# Altium PCB PCB1.PcbDoc
Units mm, origin at the board's own origin, x right, y up, seen from the top; angles counter-clockwise.
Board outline 127 x 80.77 mm, 2 copper layers (Top Layer, Bottom Layer); 21 components, 20 nets, 89 pads, 0 vias.
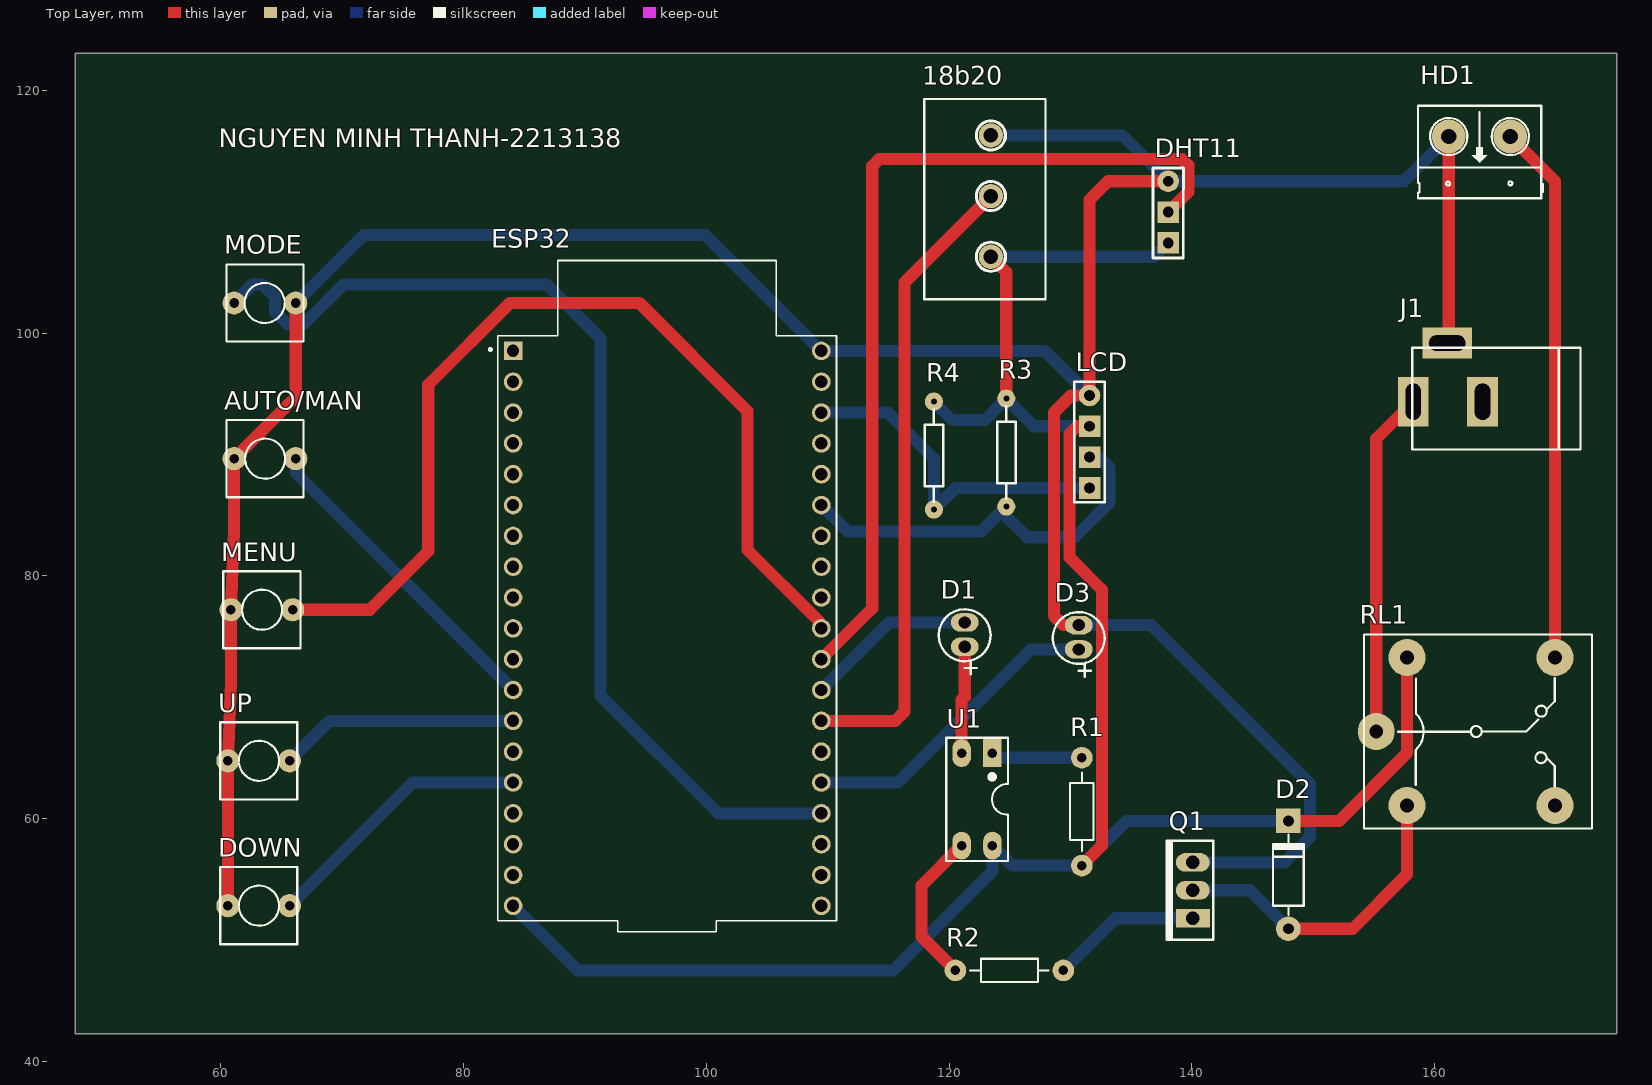
[diagram p0: Top Layer view]
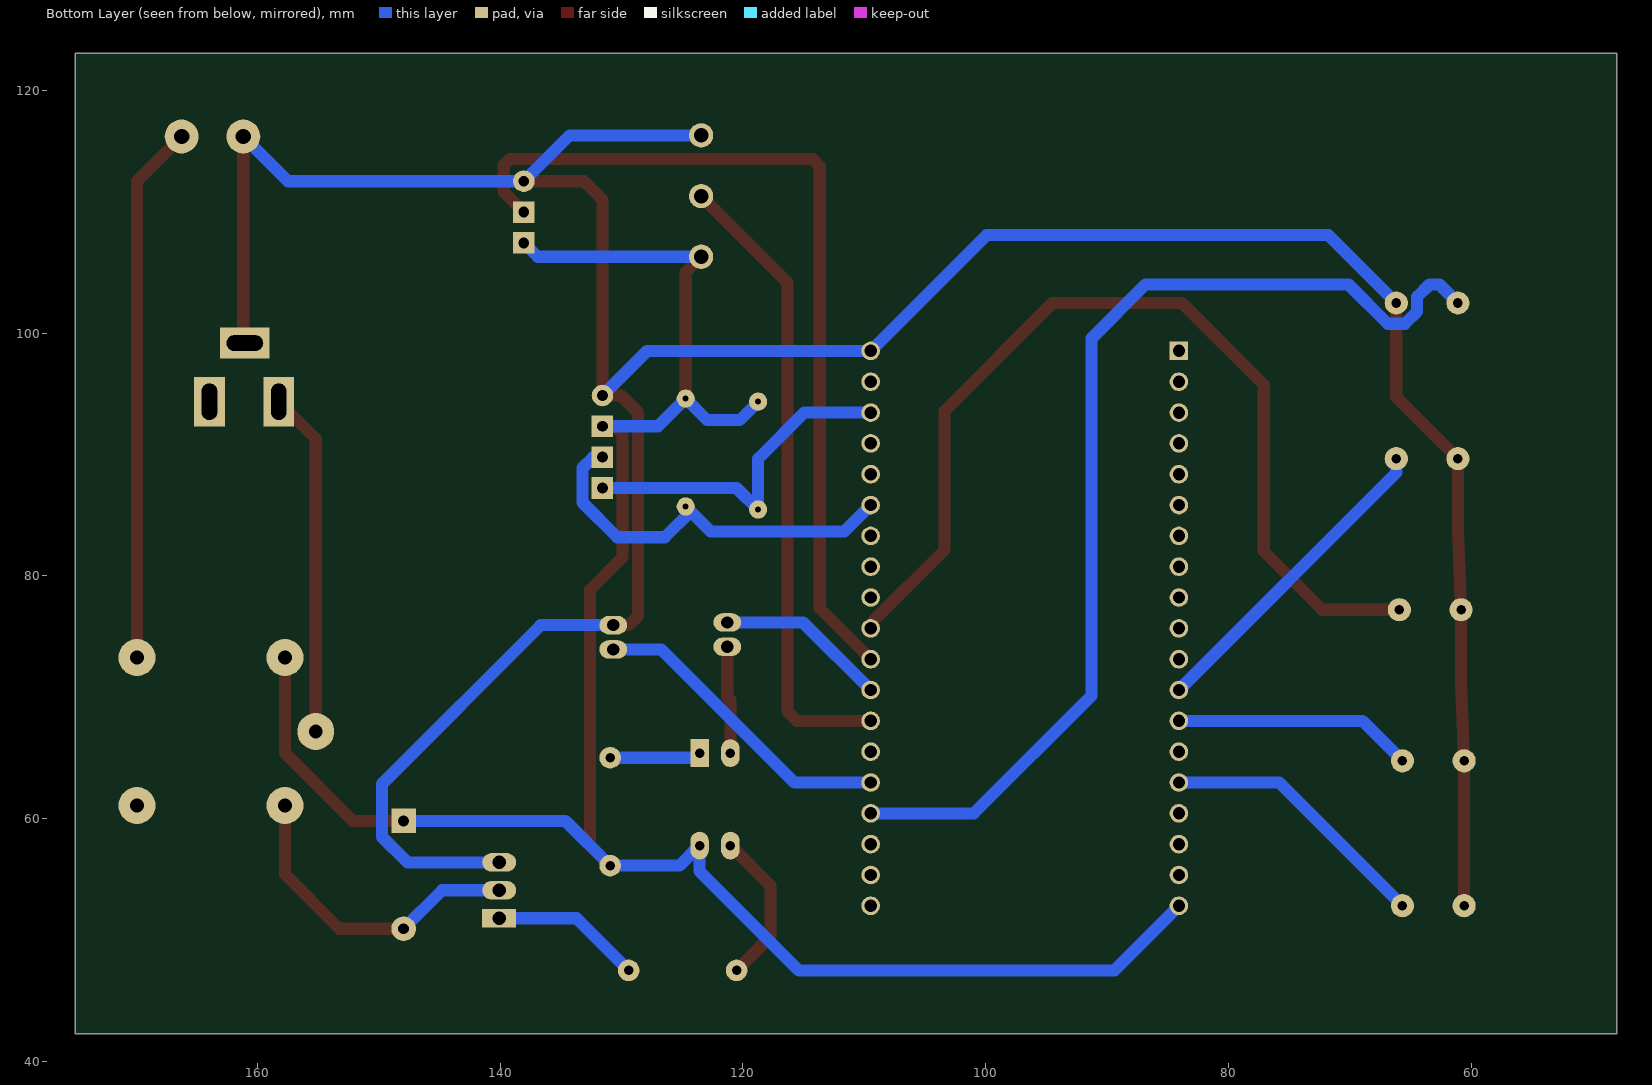
[diagram p1: Bottom Layer view, seen from below]

## Layer stack, top to bottom
Top Solder: solder mask 0.0102, Solder Resist, Dk 3.5
Top Layer: signal copper 0.0356
Dielectric 1: dielectric 0.32, FR-4, Dk 4.8
Bottom Layer: signal copper 0.0356
Bottom Solder: solder mask 0.0102, Solder Resist, Dk 3.5

## Board outline
48.006,42.291 175.006,42.291 175.006,123.063 48.006,123.063

## Design rules (kind name [scope] priority, off if disabled: settings)
Clearance [All] p1: gap=0.254 ignorepadtopadclearanceinfootprint=FALSE
PolygonConnect [All] p1: connectstyle=Relief reliefconductorwidth=0.254 reliefentries=4 polygonreliefangle="90 Angle" airgapwidth=0.254
RoutingVias [All] p1: holewidth=0.711 width=1.27 viastyle="Through Hole" minholewidth=0.711 minwidth=1.27 maxholewidth=0.711 maxwidth=1.27
SolderMaskExpansion [All] p1: expansion=0.102 istentingtop=FALSE
SupplyNets "Schematic Supply Nets_1" [InNet('GND')] p1: voltage=0.000
SupplyNets "Schematic Supply Nets" [InNet('VCC')] p2: voltage=0.000
Width [All] p1: maxlimit=1 minlimit=0.254 preferedwidth=1 toplayer_minwidth=1 minimp=50.000000 maximp=50.000000 favimp=50.000000
30 further rules are at their usual default settings.

## Components (designator, comment, footprint, x,y, rotation, side; value= is the part's Value field where it differs from the comment)
18b20 "18B20" HED3 123.444,111.299 r270 top
AUTO/MAN "SW" SW2 66.167,89.662 r180 top value="SW chip 2 pin"
D1 "LED" CAP10UF 121.285,76.168 r270 top
D2 "1N4007" D1A 147.955,50.927 r270 top
D3 "LED" CAP10UF 130.683,75.946 r270 top
DHT11 "Component_1" "Jumper 3" 138.049,112.522 r270 top
DOWN "SW" SW2 65.659,52.832 r180 top value="SW chip 2 pin"
ESP32 "ESP32-DEVKITC" MODULE_ESP32-DEVKITC 96.774,75.692 r0 top
HD1 "Header 2" HED2 166.243,116.205 r180 top
J1 "JACK DC 5MM" "JACK DC 5MM" 166.878,94.361 r180 top
LCD "Component_1" "Jumper 4" 131.572,93.574 r270 top
MENU "SW" SW2 65.913,77.216 r180 top value="SW chip 2 pin"
MODE "SW" SW2 61.087,102.489 r0 top value="SW chip 2 pin"
Q1 "C1815" TO126 140.081,54.102 r90 top
R1 "1k" R1/4W 130.937,56.134 r90 top value="R1/4W - 1K"
R2 "1k" R1/4W 120.523,47.498 r0 top value="R1/4W - 1K"
R3 "4.7k" R1/6W 124.714,90.17 r90 top value="R1/4W - 1K"
R4 "4.7k" R1/6W 118.745,89.916 r90 top value="R1/4W - 1K"
RL1 "Relay 10A/12V" RL_SPDT_10A 155.194,67.183 r0 top value="Relay SPDT, 10A, 12V"
U1 "PC817" DIP4/W0.3 123.571,65.405 r180 top
UP "SW" SW2 65.659,64.77 r180 top value="SW chip 2 pin"

## Footprints (in the part's own frame and the unit in brackets; to place one, negate y for a bottom-side part, rotate by r counter-clockwise, add the part's x,y. Pads: shape width x height; smd on the part's side, far side on the other; paste and mask are expansions set on the pad)
CAP10UF [mil]
  oval 60x90 hole 39.37 unplated: 1(78.74,0) 2(0,0)
  silkscreen extent -42,-84 167,84
D1A [mil] "Diode 1A, W 100mil, L 350mil"
  round 80 hole 35: 1(0,0)
  rect 80x80 hole 35: 2(-350,0)
  silkscreen extent -305,-50 -45,50, body extent -386,-33 34,36, height 84
DIP4/W0.3 [mil] "4 PIN, W 300mil, Pin to pin 100mil"
  rect 60x90 hole 31: 1(0,0)
  oval 60x90 hole 31: 2(100,0) 3(100,300) 4(0,300)
  silkscreen extent -50,-50 150,350, body extent -59,-10 159,305, height 170
HED2 [mil] "Header 2, 2 pin, hight 300mil, Pin to Pin 200, Colour Green"
  round 110 hole 50: 1(0,0) 2(200,0)
  silkscreen extent -106,-100 300,200, body extent -92,-140 302,155, height 394
HED3 [mm]
  round 2 hole 1.2 mask+0.01: 1(-5,0) 2(0,0) 3(5,0)
  silkscreen extent -8,-5.5 8.5,4.5, body extent -7.5,-5 8,4, height 12.5
"JACK DC 5MM" [mil]
  rect 100x160 hole 50 slot 118.11 at 90 deg: 1(340,0) 2(115,0)
  rect 160x100 hole 50 slot 118.11 at 0 deg: 3(230,-190)
  silkscreen extent -202,-175 343,155, body extent -187,-200 357,174, height 434
"Jumper 3" [mil]
  round 70 hole 35 unplated: 1(0,0)
  rect 70x70 hole 35 unplated: 2(100,0) 3(200,0)
  silkscreen extent -43,-49 249,49
"Jumper 4" [mil]
  round 70 hole 35 unplated: 1(-51,0)
  rect 70x70 hole 35 unplated: 2(49,0) 3(149,0) 4(249,0)
  silkscreen extent -95,-49 295,49
MODULE_ESP32-DEVKITC [mm]
  rect 1.53x1.53 / inner round 1.53 / far side rect 1.53x1.53 hole 1.02: 1(-12.7,22.85)
  round 1.53 hole 1.02: 2(-12.7,20.31) 3(-12.7,17.77) 4(-12.7,15.23) 5(-12.7,12.69) 6(-12.7,10.15) 7(-12.7,7.61) 8(-12.7,5.07) 9(-12.7,2.53) 10(-12.7,-0.01) 11(-12.7,-2.55) 12(-12.7,-5.09) 13(-12.7,-7.63) 14(-12.7,-10.17) 15(-12.7,-12.71) 16(-12.7,-15.25) 17(-12.7,-17.79) 18(-12.7,-20.33) 19(-12.7,-22.87) 20(12.7,-22.87) 21(12.7,-20.33) 22(12.7,-17.79) 23(12.7,-15.25) 24(12.7,-12.71) 25(12.7,-10.17) 26(12.7,-7.63) 27(12.7,-5.09) 28(12.7,-2.55) 29(12.7,-0.01) 30(12.7,2.53) 31(12.7,5.07) 32(12.7,7.61) 33(12.7,10.15) 34(12.7,12.69) 35(12.7,15.23) 36(12.7,17.77) 37(12.7,20.31) 38(12.7,22.85)
  silkscreen extent -14.67,-25 13.95,30.3, body extent -13.97,-24.8 13.97,30.3, height 6.69
R1/4W [mil] "R 1/4W, 2 Pin, 350mil"
  round 70 hole 31: 1(0,0) 2(350,0)
  silkscreen extent 48,-38 302,38, body extent -40,-47 386,47, height 111
R1/6W [mm]
  round 1.5 hole 0.5: 1(-4.445,0) 2(4.445,0)
  silkscreen extent -3.81,-0.76 3.81,0.76
RL_SPDT_10A [mil] "Relay SPDT, 5 pin, 10A,W 650mil, L 800mil, H 800mil"
  round 120 hole 45: 1(0,0) 2(580,240) 3(580,-240) 4(100,-240) 5(100,240)
  silkscreen extent -40,-315 700,315, body extent -33,-307 719,303, height 642
SW2 [mil] "SW button 2pin, 250x 250 mil"
  round 75 hole 31: 1(0,0) 2(200,0)
  silkscreen extent -25,-125 225,125
TO126 [mil] "TO, Thru-Hole, Vertical, Heatsink Mounted; 3 In-Line Leads; Pitch 2.54 mm; Pin sequence 1, 3, 2"
  rect 60x110 hole 43.31: 1(-90.55,0)
  oval 60x110 hole 43.31: 2(0,0) 3(90.55,0)
  silkscreen extent -160,-67 160,85, body extent -154,-71 154,35, height 614

## Part data
AUTO/MAN DOWN MENU MODE UP: library part SW2, "Switch button 2 pin"
D2: library part D1A, "Diode 1A"
ESP32: "ESP32-WROOM-32UE series Transceiver; 802.11 b/g/n (Wi-Fi, WiFi, WLAN), Bluetooth Â® Smart Ready 4.x Dual Mode Evaluation Board", Package=None, Check_prices=https://www.snapeda.com/parts/ESP32-DEVKITC/Espressif+Systems/view-part/?ref=eda, MF="Espressif Systems", MP=ESP32-DEVKITC, SnapEDA_Link=https://www.snapeda.com/parts/ESP32-DEVKITC/Espressif+Systems/view-part/?ref=snap
HD1: library part Hed2, "Header 2 (Green)"
Q1: "NPN 600mW, ECB"
R1 R2: library part R1/4W, "Resistor 1/4W"
R3 R4: library part Res, "Resistor 1/4W"
RL1: library part "Relay 1", "Relay SPDT,10A - 12VDC 5 Pin"
U1: library part PC817_1, "Single Opto"

## Nets (pads, with @x,y where several pads share a name; then routed paths per layer and width w, separated by ;. In a path a pad name is that pad's centre, name@x,y a point inside that pad or via, vN(x,y) a via of type N, cw(c..) or ccw(c..) an arc to the next point about the centre after c; other vN are vias at no path point)
GND: 18b20.1 AUTO/MAN.2 D3.2 DHT11.1 DOWN.2 ESP32.38 HD1.2 J1.3 LCD.1 MENU.2 MODE.2 Q1.3 UP.2 | length 268.1
  Top Layer w1: DOWN.2 UP.2 60.833,71.247 MENU.2 61.087,83.693 AUTO/MAN.2 66.167,94.742 MODE.2 ; D3.2 129.413,75.946 128.651,76.708 128.651,93.472 130.048,94.869 LCD.1 131.572,110.998 133.096,112.522 DHT11.1 ; J1.3 161.163,99.187 HD1.2
  Bottom Layer w1: MODE.2 71.755,108.077 99.939,108.077 ESP32.38 127.899,98.542 LCD.1 ; 18b20.1 134.272,116.299 DHT11.1 157.48,112.522 HD1.2 ; D3.2 136.652,75.946 149.733,62.865 149.733,58.496 147.639,56.402 Q1.3
IO4: 18b20.2 ESP32.26 | length 52.6
  Top Layer w1: ESP32.26 115.56,68.062 116.332,68.834 116.332,104.187 18b20.2
IO5: ESP32.29 MENU.1 | length 80.1
  Top Layer w1: MENU.1 72.263,77.216 77.089,82.042 77.089,95.758 83.82,102.489 94.488,102.489 103.378,93.599 103.378,82.17 109.373,76.175 109.373,75.783 ESP32.29
IO12: ESP32.13 UP.1 | length 19.8
  Bottom Layer w1: UP.1 68.951,68.062 ESP32.13
IO13: DOWN.1 ESP32.15 | length 22.6
  Bottom Layer w1: DOWN.1 75.809,62.982 ESP32.15
IO14: AUTO/MAN.1 ESP32.12 | length 26.5
  Bottom Layer w1: AUTO/MAN.1 66.167,88.509 ESP32.12
IO15: ESP32.23 MODE.1 | length 87.7
  Bottom Layer w1: MODE.1 62.611,104.013 63.439,104.013 64.45,103.003 64.45,101.793 65.46,100.782 66.874,100.782 70.104,104.013 86.843,104.013 91.288,99.568 91.288,70.129 100.975,60.442 ESP32.23
IO16: D1.2 ESP32.27 | length 14.1
  Bottom Layer w1: ESP32.27 115.04,76.168 D1.2
IO17: DHT11.2 ESP32.28 | length 73.4
  Top Layer w1: ESP32.28 113.665,77.333 113.665,113.765 114.251,114.351 139.192,114.351 139.7,113.843 139.7,111.633 DHT11.2
IO21: ESP32.33 LCD.3 R3.1 | length 32.8
  Bottom Layer w1: ESP32.33 111.648,83.668 122.657,83.668 R3.1@124.308,85.319 ; R3.1 R3.1@124.308,85.319 ; LCD.3 132.334,89.789 133.223,88.9 133.223,86.055 130.353,83.185 126.441,83.185 R3.1@124.308,85.319
IO22: ESP32.36 LCD.4 R4.1 | length 28.6
  Bottom Layer w1: ESP32.36 114.945,93.462 118.745,89.662 R4.1 120.523,87.249 LCD.4
NetD1_1: D1.1 U1.2 | length 8.9
  Top Layer w1: U1.2 121.031,69.774 121.285,70.028 D1.1
NetD2_1: D2.1 Q1.2 RL1.4 | length 26.5
  Top Layer w1: D2.1 153.249,50.927 157.734,55.412 RL1.4
  Bottom Layer w1: Q1.2 144.78,54.102 D2.1
NetD3_1: D3.1 ESP32.24 | length 25.8
  Bottom Layer w1: ESP32.24 115.763,62.982 126.727,73.946 D3.1
NetHD1_1: HD1.1 RL1.2 | length 44.5
  Top Layer w1: HD1.1 169.926,112.522 RL1.2
NetJ1_1: J1.1 RL1.1 | length 28.4
  Top Layer w1: RL1.1 155.194,91.313 J1.1
NetQ1_1: Q1.1 R2.2 | length 12.5
  Bottom Layer w1: R2.2 133.717,51.802 Q1.1
NetR1_2: R1.2 U1.1 | length 7.7
  Bottom Layer w1: U1.1 123.571,65.024 R1.2
NetR2_1: R2.1 U1.3 | length 12.8
  Top Layer w1: R2.1 117.729,50.292 117.729,54.483 U1.3
VCC: 18b20.3 D2.2 DHT11.3 ESP32.19 LCD.2 R1.1 R3.2 R4.2 RL1.5 U1.4 | length 175.5
  Top Layer w1: 18b20.3 124.714,105.029 R3.2 ; R1.1 132.588,57.785 132.588,78.867 129.921,81.534 129.921,91.694 130.556,92.329 LCD.2 ; D2.2 152.146,59.817 157.734,65.405 RL1.5
  Bottom Layer w1: ESP32.19 89.398,47.498 115.392,47.498 123.571,55.677 U1.4 125.222,56.134 R1.1 134.62,59.817 D2.2 ; R4.2 120.269,92.837 122.936,92.837 R3.2 127,92.329 LCD.2 ; 18b20.3 136.906,106.299 DHT11.3
pads on no net: ESP32.1 ESP32.2 ESP32.3 ESP32.4 ESP32.5 ESP32.6 ESP32.7 ESP32.8 ESP32.9 ESP32.10 ESP32.11 ESP32.14 ESP32.16 ESP32.17 ESP32.18 ESP32.20 ESP32.21 ESP32.22 ESP32.25 ESP32.30 ESP32.31 ESP32.32 ESP32.34 ESP32.35 ESP32.37 J1.2 RL1.3

## Silkscreen, mask and mechanical layers (free items; w line width, h text height)
Top Overlay:
  text "NGUYEN MINH THANH-2213138" at 59.817,115.316 h1.52